# EAGLE board basic-inline-turbidimeter_main_board_v1.9 (EAGLE 7.3.0)
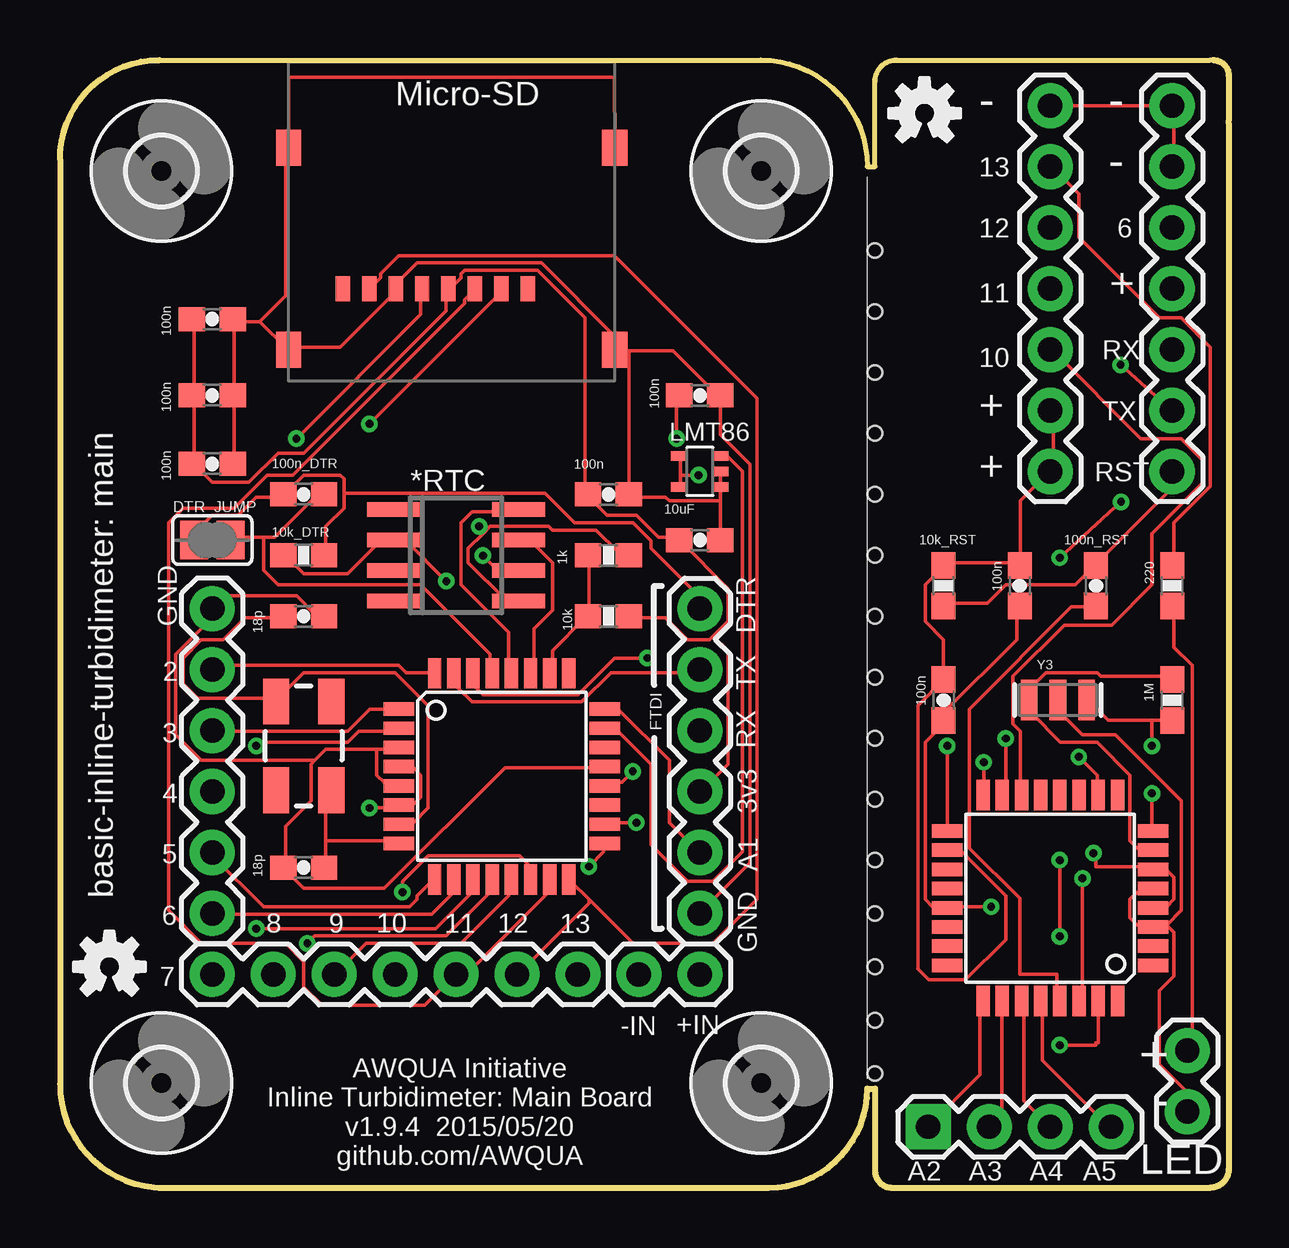
[diagram p0: board, top side]
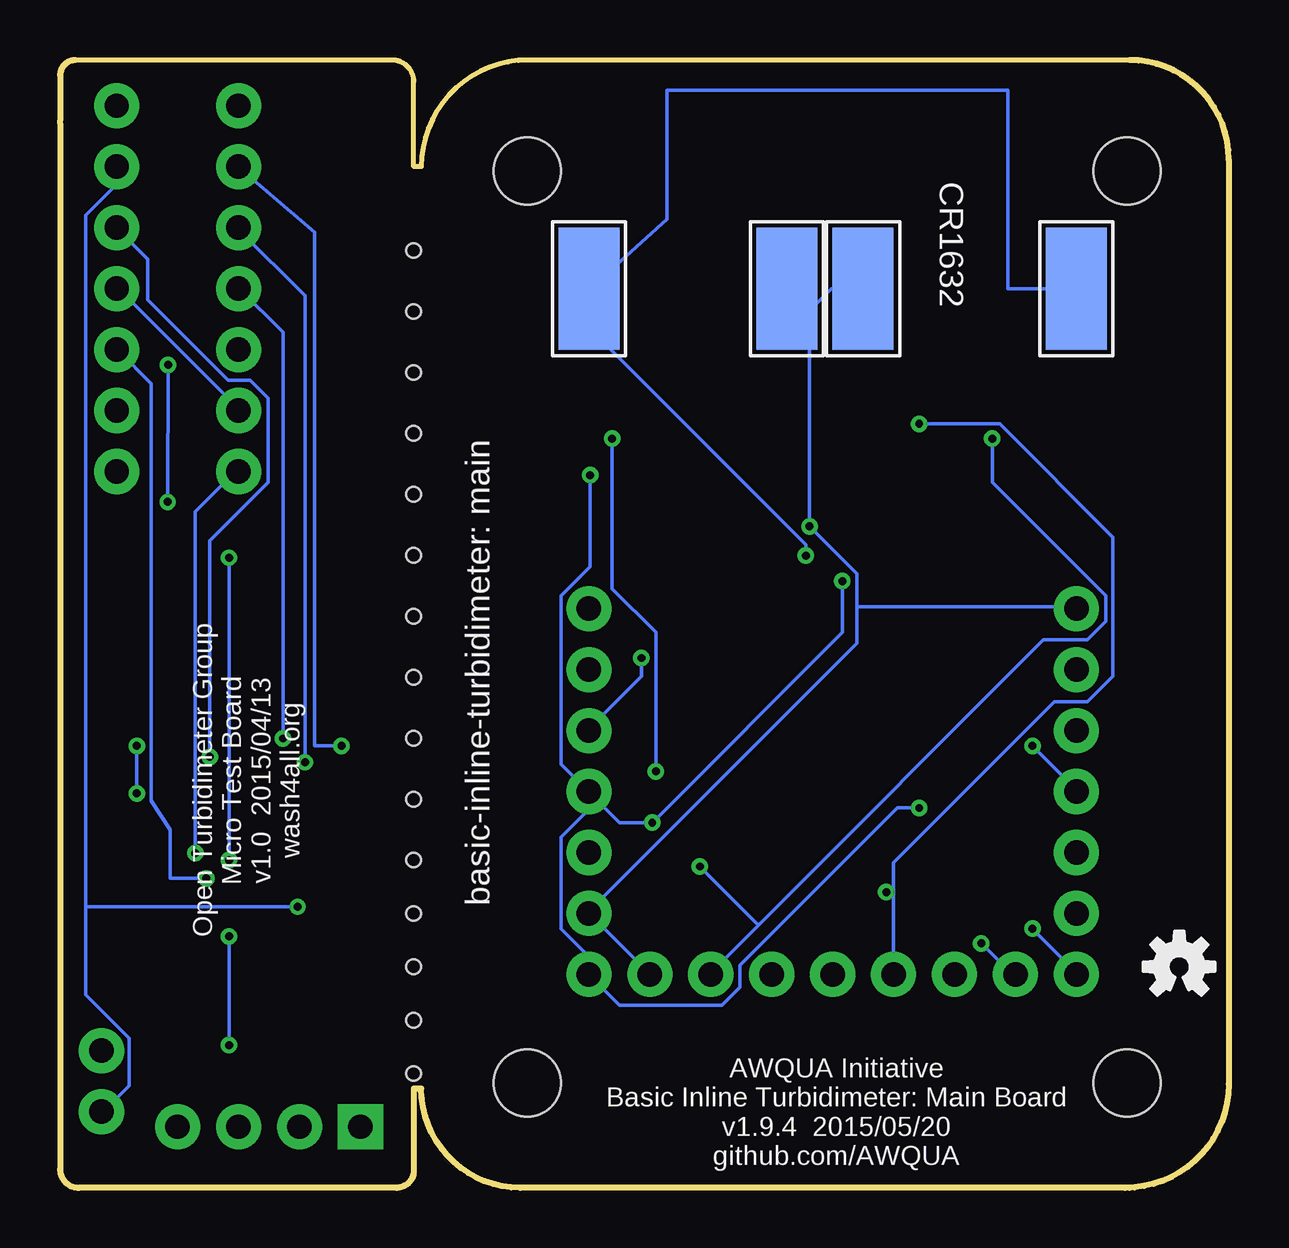
[diagram p1: board, bottom side, seen from below]

Size 48.72 x 46.99 mm. Coordinates in mm from the lower left corner, seen from the top.
Outline: 4.32,0 arc-90 0,4.32 0,42.85 arc-90 4.14,46.99
Outline: 48.72,44.37 48.72,0.78 arc-90 47.93,0
Outline: 48.07,46.99 arc-90 48.72,46.34 48.72,44.45
Outline: 4.13,46.99 29.21,46.99 arc-90 33.65,42.55 33.97,42.55 33.97,46.09 arc-90 34.87,46.99 47.94,46.99
Outline: 4.13,0 29.53,0 arc90 33.65,4.13 33.97,4.13 33.97,0.71 arc90 34.68,0 47.94,0
Copper layers (1*16): Top 0.0356mm / dielectric 1.5011mm / Bottom 0.0356mm
Design rules "default *": minimum track width 6mil, minimum drill 13mil, track to track 6mil, track to pad 6mil, pad to pad 6mil, via to via 6mil, smd to smd 6mil, copper to edge 15mil, drill to drill 6mil, minimum pad ring 7mil, minimum via ring 7mil, stop-mask expansion 4mil, vias tented up to drill 15mil, thermal gap 10mil
Holes 0.6 mm at 33.97,39.05 33.97,36.51 33.97,33.97 33.97,31.43 33.97,28.89 33.97,26.35 33.97,23.81 33.97,21.27 33.97,18.73 33.97,16.19 33.97,13.65 33.97,11.43 33.97,9.21 33.97,6.99 33.97,4.76

## Footprints (pad centres in the part's own frame; a part is rotated, then mirrored left to right if it is on the bottom)
DS3231M = smd 2.2 x 0.6: 1 -2.6,1.905; 2 -2.6,0.635; 3 -2.6,-0.635; 4 -2.6,-1.905; 5 2.6,-1.905; 6 2.6,-0.635; 7 2.6,0.635; 8 2.6,1.905
0603-CAP = smd 1.1 x 1: 1 -0.85,0; 2 0.85,0
SJ = smd 1.168 x 1.6: 1 -0.762,0; 2 0.762,0
TQFP32-08 = smd 1.27 x 0.559: 1 -4.293,2.8; 2 -4.293,2; 3 -4.293,1.2; 4 -4.293,0.4; 5 -4.293,-0.4; 6 -4.293,-1.2; 7 -4.293,-2; 8 -4.293,-2.8; 17 4.293,-2.8; 18 4.293,-2; 19 4.293,-1.2; 20 4.293,-0.4; 21 4.293,0.4; 22 4.293,1.2; 23 4.293,2; 24 4.293,2.8 | smd 0.559 x 1.27: 9 -2.8,-4.293; 10 -2,-4.293; 11 -1.2,-4.293; 12 -0.4,-4.293; 13 0.4,-4.293; 14 1.2,-4.293; 15 2,-4.293; 16 2.8,-4.293; 25 2.8,4.293; 26 2,4.293; 27 1.2,4.293; 28 0.4,4.293; 29 -0.4,4.293; 30 -1.2,4.293; 31 -2,4.293; 32 -2.8,4.293
1X02 = drill 1.016 pad 1.88: 1 0,0; 2 2.54,0
1X07 = drill 1.016 pad 1.88: 1 0,0; 2 2.54,0; 3 5.08,0; 4 7.62,0; 5 10.16,0; 6 12.7,0; 7 15.24,0
1X04 = drill 1.016 pad 1.88 square: 1 0,0 | drill 1.016 pad 1.88: 2 2.54,0; 3 5.08,0; 4 7.62,0
1X06 = drill 1.016 pad 1.88: 1 0,0; 2 2.54,0; 3 5.08,0; 4 7.62,0; 5 10.16,0; 6 12.7,0
MICROSD-1010030368 = smd 1.05 x 1.5: FT1 0,8.4; FT2 0,0; FT3 13.6,0; FT4 13.6,8.4 | smd 0.6 x 1.05: PIN1 9.97,2.53; PIN2 8.87,2.53; PIN3 7.77,2.53; PIN4 6.67,2.53; PIN5 5.57,2.53; PIN6 4.47,2.53; PIN7 3.37,2.53; PIN8 2.27,2.53
5-2,5 = smd 2.54 x 5.08: 1 0,0
0603-RES = smd 1.1 x 1: 1 -0.85,0; 2 0.85,0
2,8 = hole 2.8: 0,0
LMT86 = smd 0.4 x 0.7: 1 -0.65,-0.85; 2 0,-0.85; 3 0.65,-0.85; 4 0.65,0.85; 5 -0.65,0.85
CRYSTAL-SMD-5X3 = smd 1.9 x 1.1: 1 -1.85,-1.15; 2 1.85,-1.15; 3 1.85,1.15; 4 -1.85,1.15
RESONATOR-SMD = smd 0.7 x 1.7: 1 -1.2,0; 2 0,0; 3 1.2,0

## Placement (x,y rotation side)
*RTC  [DS3231M]  16.51,26.35 0 top
C1  18p  [0603-CAP]  10.16,23.81 180 top
C2  18p  [0603-CAP]  10.16,13.34 0 top
C3  100n_DTR  [0603-CAP]  10.16,28.89 0 top
C4  100n  [0603-CAP]  6.35,36.2 180 top
C5  100n  [0603-CAP]  26.67,33.02 180 top
C6  100n  [0603-CAP]  6.35,30.16 0 top
C7  100n  [0603-CAP]  22.86,28.89 180 top
C8  100n  [0603-CAP]  6.35,33.02 0 top
C9  100n  [0603-CAP]  36.83,20.32 270 top
C10  100n  [0603-CAP]  40,25.08 270 top
C11  100n_RST  [0603-CAP]  43.18,25.08 270 top
C12  10uF  [0603-CAP]  26.67,26.99 180 top
DTR_JUMP  [SJ]  6.35,26.99 180 top
IC1  MEGA8-AI  [TQFP32-08]  18.41,17.14 0 top
IC2  MEGA8-AI  [TQFP32-08]  41.27,12.06 180 top
JP1  M02PTH  [1X02]  24.13,8.89 0 top
JP2  [1X07]  46.35,45.09 270 top
JP3  [1X07]  41.27,45.09 270 top
JP4  [1X04]  36.2,2.54 0 top
JP5  [1X06]  26.67,11.43 90 top
JP6  [1X06]  6.35,24.13 270 top
JP8  [1X07]  21.59,8.89 180 top
LED  M02PTH  [1X02]  46.99,5.71 270 top
MICRO-SD  MICROSD-1010030368  [MICROSD-1010030368]  9.53,34.93 0 top
PAD1  WIREPADSMD5-2,5  [5-2,5]  26.67,37.47 0 bottom
PAD2  WIREPADSMD5-2,5  [5-2,5]  6.35,37.47 0 bottom
PAD3  WIREPADSMD5-2,5  [5-2,5]  18.41,37.47 0 bottom
PAD4  WIREPADSMD5-2,5  [5-2,5]  15.24,37.47 0 bottom
R1  10k  [0603-RES]  22.86,23.81 180 top
R2  1k  [0603-RES]  22.86,26.35 180 top
R3  10k_DTR  [0603-RES]  10.16,26.35 0 top
R4  10k_RST  [0603-RES]  36.83,25.08 90 top
R5  220  [0603-RES]  46.35,25.08 270 top
R8  1M  [0603-RES]  46.35,20.32 90 top
U$1  [2,8]  4.23,42.37 0 top
U$2  [OSHW-LOGO-S]  2.06,9.21 0 top
U$3  [2,8]  29.23,42.37 0 top
U$4  LMT86  [LMT86]  26.67,29.84 90 top
U$5  [2,8]  29.23,4.37 0 top
U$6  [2,8]  4.23,4.37 0 top
U$7  [OSHW-LOGO-S]  36.04,44.77 0 top
U$8  [OSHW-LOGO-S]  2.06,9.21 0 bottom
Y1  [CRYSTAL-SMD-5X3]  10.16,18.41 90 top
Y3  16MHz  [RESONATOR-SMD]  41.59,20.32 0 top

## Library data of the parts
*RTC MICRO-SD U$4 = open_source_turbidimeter
C1-C12 JP2 JP3 JP8 U$2 U$7 U$8 Y1 = SparkFun
DTR_JUMP = jumper
IC1 IC2 = atmel; MPN: ATMEGA8-16AU; OC_FARNELL: 9171371; OC_NEWARK: 73M8863
JP1 JP4-JP6 LED = SparkFun-Connectors
PAD1-PAD4 = wirepad
R1-R5 R8 = SparkFun-Resistors
U$1 U$3 U$5 U$6 = holes
Y3 = SparkFun-FreqCtrl; PROD_ID: XTAL-08900

## Nets
ADC6: IC1.19
ADC7: IC1.22
AREF: C5.2 IC1.20
GND: *RTC.5 C1.1 C2.1 C4.1 C5.1 C6.2 C7.1 C8.2 C12.1 IC1.3 IC1.5 IC1.21 JP1.1 JP5.1 JP6.1 MICRO-SD.FT1 MICRO-SD.FT2 MICRO-SD.FT3 MICRO-SD.FT4 MICRO-SD.PIN6 PAD3.1 PAD4.1 R2.1 U$4.1 U$4.2
GND2: C9.2 C10.2 IC2.3 IC2.5 IC2.21 JP2.1 JP2.2 JP3.1 LED.2 Y3.2
N$2: C11.2 IC2.29
N$9: LED.1 R5.2
N$11: IC2.7 R8.2 Y3.1
N$12: IC2.8 R8.1 Y3.3
PB0: IC1.12 JP8.6
PB1: IC1.13 JP8.5
PB2: IC1.14 JP8.4 MICRO-SD.PIN2
PB2_2: IC2.14 JP3.5
PB3: IC1.15 JP8.3 MICRO-SD.PIN3
PB3_2: IC2.15 JP3.4
PB4: IC1.16 JP8.2 MICRO-SD.PIN7
PB4_2: IC2.16 JP3.3
PB5: IC1.17 JP8.1 MICRO-SD.PIN5
PB5_2: IC2.17 JP3.2 R5.1
PC0: IC1.23 U$4.3
PC1: IC1.24 JP5.2
PC2: IC1.25
PC2_2: IC2.25 JP4.1
PC3: IC1.26 R1.2 R2.2
PC3_2: IC2.26 JP4.2
PC4: *RTC.7 IC1.27
PC4_2: IC2.27 JP4.3
PC5: *RTC.8 IC1.28
PC5_2: IC2.28 JP4.4
PC6: C3.2 DTR_JUMP.1 IC1.29
PD0: IC1.30 JP5.4
PD0_2: IC2.30 JP2.5
PD1: IC1.31 JP5.5
PD1_2: IC2.31 JP2.6
PD2: IC1.32 JP6.2
PD3: IC1.1 JP6.3
PD4: IC1.2 JP6.4
PD5: IC1.9 JP6.5
PD6: IC1.10 JP6.6
PD6_2: IC2.10 JP2.3
PD7: IC1.11 JP8.7
Q1: C2.2 IC1.8 Y1.1
Q2: C1.2 IC1.7 Y1.3
RST: C3.1 DTR_JUMP.2 JP5.6 R3.2
RST2: C11.1 JP2.7 R4.1
VBAT: *RTC.6 PAD1.1 PAD2.1
VCC: *RTC.2 C4.2 C6.1 C7.2 C8.1 C12.2 IC1.4 IC1.6 IC1.18 JP1.2 JP5.3 MICRO-SD.PIN4 R1.1 R3.1 U$4.4 U$4.5
VCC2: C9.1 C10.1 IC2.4 IC2.6 IC2.18 JP2.4 JP3.6 JP3.7 R4.2

## Tracks (layer width: path | path; a pad name or v marks a point on that pad's centre or on a via)
AREF  (via drill 0.33)
  Top 0.152: v25.71,31.22 25.71,32.89 C5.2 | v23.88,17.35 23.42,16.89 22.81,16.89 IC1.20
  Bottom 0.152: v25.71,31.22 25.71,24.97 23.88,23.14 v23.88,17.35
GND  (via drill 0.33)
  Top 0.152: U$4.2 27.53,29.84 27.53,29.23 U$4.1 27.53,29.08 27.53,28.63 | 27.53,28.63 27.53,27.1 C12.1 | 27.53,28.63 25.4,28.63 25.25,28.78 23.72,28.78 C7.1 23.72,28.93 23.72,34.87 | 23.72,34.87 23.27,34.87 MICRO-SD.FT3 23.11,35.03 23.11,35.48 20.07,38.53 14.88,38.53 14.12,37.77 14.12,37.47 MICRO-SD.PIN6 13.97,37.31 11.68,35.03 9.55,35.03 MICRO-SD.FT2 9.4,35.03 8.33,36.09 | 23.72,34.87 25.55,34.87 27.38,33.05 C5.1 27.53,32.89 27.53,31.37 28.75,30.15 28.75,13.54 26.77,11.56 JP5.1 | C6.2 7.26,30.3 7.26,32.89 C8.2 7.26,33.05 7.26,36.09 | 8.33,36.09 7.26,36.09 | 8.33,36.09 9.4,37.16 9.4,43.26 MICRO-SD.FT1 9.53,46.27 23.11,46.27 MICRO-SD.FT4 | 7.26,36.09 C4.1 | C1.1 10.92,23.9 10.62,23.9 9.86,24.66 6.81,24.66 6.35,24.21 JP6.1 6.35,23.75 4.83,22.22 4.83,18.87 5.89,17.8 10.62,17.8 | 10.62,17.8 11.07,18.26 13.21,18.26 | 10.62,17.8 10.46,17.65 10.46,16.13 9.4,15.06 9.4,13.39 C2.1 9.4,13.23 10.16,12.47 13.51,12.47 18.54,17.5 22.66,17.5 IC1.21 | 13.21,18.26 14.12,18.26 IC1.3 | 13.21,18.26 13.21,17.2 13.51,16.89 14.12,16.89 IC1.5 | 17.63,27.25 17.02,26.64 17.02,26.04 18.54,24.51 19,24.51 *RTC.5 | 17.63,27.25 17.93,27.56 20.37,27.56 20.52,27.41 22.35,27.41 23.27,26.49 23.57,26.49 R2.1 | 17.63,27.25 17.63,27.41 v17.48,27.56
  Bottom 0.152: JP1.1 24.18,8.97 26.62,11.4 JP5.1 26.62,11.56 15.49,22.68 15.49,24.21 | 17.48,36.55 v17.48,27.56 15.49,25.58 15.49,24.21 | 17.48,36.55 18.39,37.47 PAD3.1 17.48,36.55 | PAD4.1 16.56,37.47 17.48,36.55 | 15.49,24.21 6.35,24.21 JP6.1
GND2  (via drill 0.33)
  Top 0.152: C10.2 39.88,24.21 39.88,22.83 36.83,19.79 C9.2 36.83,19.33 36.07,18.57 36.07,12.01 36.37,11.71 36.98,11.71 | JP3.1 JP2.1 46.43,45.09 46.43,42.65 JP2.2 | IC2.3 45.52,10.95 44.91,10.95 44.6,11.25 44.6,12.01 44.91,12.32 45.52,12.32 IC2.5 | 46.13,10.95 46.74,11.56 46.74,16.13 43.99,18.87 42.62,18.87 41.71,19.79 41.71,20.24 Y3.2 | 46.13,10.95 45.67,10.95 IC2.3 | 46.13,10.95 46.43,10.64 46.43,8.81 45.82,8.2 45.82,5.16 46.89,4.09 46.89,3.17 LED.2 | 46.13,10.95 IC2.3 | v38.81,11.71 36.98,11.71 | 36.98,11.71 IC2.21
  Bottom 0.152: 47.65,11.71 47.65,8.05 45.82,6.22 45.82,4.24 46.89,3.17 LED.2 | 47.65,11.71 47.65,40.51 46.43,41.73 46.43,42.49 JP2.2 | 47.65,11.71 v38.81,11.71
N$2
  Top 0.152: C11.2 43.08,24.21 42.16,24.21 37.9,19.94 37.9,14.15 40,12.06 40,8.9 41.55,8.9 41.55,7.9 IC2.29
N$9
  Top 0.152: LED.1 47.19,5.92 47.19,21.77 46.43,22.53 46.43,24.21 R5.2
N$11
  Top 0.152: R8.2 46.28,21.31 43.38,21.31 43.23,21.46 41.1,21.46 40.49,20.85 40.49,20.4 Y3.1 40.49,20.24 40.49,19.79 41.71,18.57 43.23,18.57 44.6,17.2 44.6,14.45 44.91,14.15 45.52,14.15 IC2.7
N$12  (via drill 0.33)
  Top 0.152: 45.52,19.48 43.69,19.48 42.93,20.24 Y3.3 | 45.52,19.48 46.28,19.48 R8.1 | v45.52,16.43 45.52,14.91 IC2.8 | 45.52,19.48 v45.52,18.41
  Bottom 0.152: v45.52,18.41 v45.52,16.43
PB0  (via drill 0.33)
  Top 0.152: v10.31,10.19 10.62,10.49 16.1,10.49 17.93,12.32 17.93,12.78 IC1.12
  Bottom 0.152: v10.31,10.19 8.94,8.81 JP8.6
PB1
  Top 0.152: IC1.13 18.69,12.78 18.69,12.17 16.71,10.19 12.75,10.19 11.53,8.97 JP8.5
PB2  (via drill 0.33)
  Top 0.152: v12.9,31.83 18.39,37.31 MICRO-SD.PIN2 | v14.28,12.32 14.28,12.78 15.34,13.84 19.15,13.84 19.61,13.39 19.61,12.93 IC1.14
  Bottom 0.152: v12.9,31.83 9.55,31.83 4.83,27.1 4.83,21.31 5.89,20.24 7.26,20.24 13.97,13.54 13.97,12.32 | JP8.4 13.97,12.32 | 13.97,12.32 v14.28,12.32
PB2_2
  Top 0.152: IC2.14 40.03,16.43 40.03,19.02 39.73,19.33 39.73,21.31 41.86,23.44 43.84,23.44 45.52,25.12 45.52,27.25 47.65,29.39 47.65,30.3 46.74,31.22 45.06,31.22 41.4,34.87 JP3.5
PB3
  Top 0.152: MICRO-SD.PIN3 17.17,37.31 16.87,37.01 16.87,36.86 9.7,29.69 8.64,29.69 7.26,28.32 5.13,28.32 4.52,27.71 4.52,11.56 5.89,10.19 9.4,10.19 10.16,9.42 10.16,8.36 10.92,7.6 15.19,7.6 16.41,8.81 JP8.3 16.56,8.97 17.02,8.97 20.37,12.32 20.37,12.78 IC1.15
PB3_2  (via drill 0.33)
  Top 0.152: v39.42,18.72 39.42,16.43 IC2.15
  Bottom 0.152: v39.42,18.72 39.42,35.64 41.25,37.47 JP3.4
PB4
  Top 0.152: 22.05,12.01 21.29,12.78 IC1.16 | 22.05,12.01 23.88,10.19 27.23,10.19 29.06,12.01 29.06,32.89 23.11,38.84 14.12,38.84 13.36,38.08 13.36,37.92 12.9,37.47 MICRO-SD.PIN7 | 22.05,12.01 22.05,11.86 19.15,8.97 JP8.2
PB4_2  (via drill 0.33)
  Top 0.152: v38.51,17.73 38.51,16.43 IC2.16
  Bottom 0.152: v38.51,17.73 38.51,37.16 41.25,39.9 JP3.3
PB5  (via drill 0.33)
  Top 0.152: v9.86,31.22 15.04,36.4 15.04,37.31 MICRO-SD.PIN5 | v22.05,13.39 22.66,14 22.66,14.3 IC1.17
  Bottom 0.152: v9.86,31.22 9.86,29.39 5.13,24.66 5.13,23.6 5.89,22.83 7.72,22.83 19.61,10.95 | 19.61,10.95 21.59,8.97 JP8.1 | 19.61,10.95 v22.05,13.39
PB5_2  (via drill 0.33)
  Top 0.152: R5.1 46.43,26.04 46.43,27.71 47.95,29.23 47.95,35.03 46.74,36.25 45.82,36.25 42.47,39.6 42.47,41.43 41.4,42.49 JP3.2 | v36.98,18.41 IC2.17
  Bottom 0.152: v36.98,18.41 38.1,18.41 38.1,39.82 41.25,42.49 JP3.2
PC0
  Top 0.152: U$4.3 27.53,30.45 27.84,30.45 28.45,29.84 28.45,14 27.23,12.78 26.16,12.78 24.64,14.3 24.64,17.65 23.27,19.02 22.81,19.02 IC1.23
PC1
  Top 0.152: IC1.24 22.81,19.94 23.27,19.94 25.4,17.8 25.4,15.21 26.62,14 JP5.2
PC2_2
  Top 0.152: JP4.1 38.35,4.7 38.35,7.75 IC2.25
PC3
  Top 0.152: R2.2 22.05,26.34 22.05,23.9 R1.2 21.89,23.75 20.52,22.38 20.52,21.46 IC1.26
PC3_2
  Top 0.152: IC2.26 39.27,7.75 39.27,3.02 38.81,2.57 JP4.2
PC4
  Top 0.152: IC1.27 19.76,21.46 19.76,23.29 20.52,24.05 20.52,26.04 19.61,26.95 19.15,26.95 *RTC.7
PC4_2
  Top 0.152: JP4.3 40.18,3.63 40.18,7.75 IC2.27
PC5
  Top 0.152: IC1.28 18.69,21.46 18.69,23.14 16.71,25.12 16.71,27.71 17.17,28.17 19,28.17 *RTC.8
PC5_2
  Top 0.152: IC2.28 40.95,7.75 40.95,5.31 43.69,2.57 JP4.4
PC6
  Top 0.152: 8.48,27.1 7.11,27.1 DTR_JUMP.1 | 8.48,27.1 8.94,27.1 10.62,28.78 10.92,28.78 C3.2 | 8.48,27.1 8.48,25.73 9.09,25.12 15.04,25.12 17.93,22.22 17.93,21.46 IC1.29
PD0  (via drill 0.33)
  Top 0.152: v24.49,22.07 23.11,22.07 21.59,20.55 17.63,20.55 17.32,20.85 17.32,21.31 IC1.30
  Bottom 0.152: v24.49,22.07 24.49,21.31 26.62,19.18 JP5.4
PD0_2  (via drill 0.33)
  Top 0.152: v42.62,12.89 42.62,7.9 IC2.30
  Bottom 0.152: v42.62,12.89 44.13,12.89 44.13,14.92 44.91,16.13 44.91,33.5 46.28,34.87 JP2.5
PD1
  Top 0.152: IC1.31 16.56,21.31 16.56,20.85 17.17,20.24 21.74,20.24 22.96,21.46 26.62,21.46 JP5.5
PD1_2  (via drill 0.33)
  Top 0.152: v44.23,28.57 v41.67,26.25 | v44.21,34.29 46.28,32.44 JP2.6 | 43.38,7.75 IC2.31 43.27,6.03 43.18,6.03 43.18,5.94 v41.67,5.94 | v41.67,10.48 v41.67,13.65
  Bottom 0.152: v41.67,26.25 v41.67,13.65 | v44.21,34.29 v44.23,28.57 | v41.67,5.94 v41.67,10.48
PD2
  Top 0.152: IC1.32 15.49,21.46 14.43,21.46 14.12,21.77 6.5,21.77 6.35,21.61 JP6.2
PD3
  Top 0.152: IC1.1 12.9,19.94 11.99,19.02 6.35,19.02 JP6.3
PD4  (via drill 0.33)
  Top 0.152: v8.18,18.41 8.33,18.57 11.99,18.57 12.45,19.02 14.12,19.02 IC1.2
  Bottom 0.152: v8.18,18.41 6.35,16.59 JP6.4
PD5
  Top 0.152: IC1.9 15.49,12.78 14.88,12.17 14.88,12.01 14.58,11.71 8.48,11.71 6.35,13.84 JP6.5
PD6
  Top 0.152: IC1.10 16.41,12.78 16.41,12.32 15.49,11.4 6.35,11.4 JP6.6
PD6_2  (via drill 0.33)
  Top 0.152: v42.47,17.96 43.23,17.2 43.23,16.43 IC2.10
  Bottom 0.152: v42.47,17.96 42.47,26.95 40.03,29.39 40.03,32.89 40.79,33.66 41.71,33.66 45.06,37.01 45.06,38.68 46.28,39.9 JP2.3
PD7  (via drill 0.33)
  Top 0.152: v8.18,10.79 15.65,10.79 17.17,12.32 17.17,12.78 IC1.11
  Bottom 0.152: v8.18,10.79 6.35,8.97 JP8.7
Q1
  Top 0.152: 11.07,14.45 11.07,16.28 11.23,16.43 Y1.1 | 11.07,14.45 11.07,13.39 C2.2 | 11.07,14.45 14.12,14.45 IC1.8
Q2
  Top 0.152: C1.2 9.25,23.75 7.72,23.75 6.81,22.83 5.89,22.83 5.13,22.07 5.13,21.01 5.74,20.4 8.94,20.4 Y1.3 9.09,20.4 10.16,21.46 13.97,21.46 15.34,20.09 15.34,15.82 14.73,15.21 14.12,15.21 IC1.7
RST
  Top 0.152: DTR_JUMP.2 5.59,27.25 6.35,28.02 7.42,28.02 8.18,28.78 9.25,28.78 C3.1 9.4,28.93 10.16,29.69 11.68,29.69 11.84,29.54 11.84,28.93 | 11.84,28.93 11.84,28.32 11.07,27.56 11.07,26.49 R3.2 | 11.84,28.93 20.22,28.93 21.44,27.71 23.88,27.71 24.64,26.95 24.64,26.64 26.62,24.66 26.62,24.21 JP5.6
RST2
  Top 0.152: R4.1 36.83,24.36 38.66,24.36 39.42,25.12 42.32,25.12 43.08,25.88 C11.1 43.23,26.04 46.28,29.08 46.28,29.84 JP2.7
VBAT  (via drill 0.33)
  Top 0.152: v17.63,26.34 18.24,25.73 19,25.73 *RTC.6
  Bottom 0.152: v17.63,26.34 17.63,26.8 26.62,35.79 26.62,37.47 | 26.62,37.47 23.41,40.36 23.41,45.72 9.21,45.72 9.21,37.47 PAD2.1 | 26.62,37.47 PAD1.1
VCC  (via drill 0.33)
  Top 0.152: 27.23,22.99 27.84,23.6 27.84,24.97 25.86,26.95 C12.2 25.71,27.1 24.94,27.1 24.03,28.02 22.81,28.02 22.05,28.78 C7.2 21.89,28.93 21.89,36.25 19.91,38.23 16.87,38.23 16.71,38.08 16.71,37.92 16.26,37.47 MICRO-SD.PIN4 16.1,37.31 16.1,36.55 10.16,30.61 9.09,30.61 7.87,29.39 6.35,29.39 5.59,30.15 C6.1 5.59,30.3 5.59,32.89 C8.1 5.59,33.05 5.59,36.09 C4.2 | 27.23,22.99 27.08,22.83 26.16,22.83 25.25,23.75 23.72,23.75 R1.1 | IC1.4 14.12,17.5 14.73,17.5 15.04,17.2 15.04,16.28 14.73,15.98 14.12,15.98 IC1.6 14.12,15.82 v12.9,15.82 | R3.1 9.4,26.34 10.16,25.58 11.99,25.58 13.36,26.95 13.82,26.95 *RTC.2 13.97,26.95 14.43,26.95 v16.1,25.27 | 25.86,29.69 25.86,30.45 U$4.4 | 25.86,29.69 25.86,29.23 U$4.5 | v26.62,29.69 25.86,29.69 | v24.03,15.21 22.81,15.21 IC1.18 | 27.23,22.99 27.84,22.38 27.84,17.65 26.77,16.59 JP5.3
  Bottom 0.152: v12.9,15.82 13.82,15.82 20.37,9.27 20.37,8.36 21.13,7.6 25.4,7.6 26.62,8.81 JP1.2 26.77,8.97 26.77,9.73 27.84,10.79 27.84,14.61 26.31,16.13 | v26.62,29.69 26.62,25.88 27.84,24.66 27.84,17.65 26.77,16.59 JP5.3 | 26.31,16.13 26.62,16.43 JP5.3 | 26.31,16.13 25.4,15.21 v24.03,15.21 16.1,23.14 v16.1,25.27 | 26.31,16.13 JP5.3
VCC2  (via drill 0.33)
  Top 0.152: IC2.18 36.98,14 37.59,14 39.42,12.17 39.42,10.34 37.74,8.66 36.22,8.66 35.76,9.12 35.76,20.09 C9.1 36.83,22.83 36.07,23.6 36.07,25.12 36.83,25.88 R4.2 36.83,26.04 39.88,26.04 C10.1 40.03,26.04 40.03,28.63 41.25,29.84 JP3.7 41.4,29.84 41.4,32.28 JP3.6 | IC2.4 45.67,11.71 46.13,11.71 46.43,12.01 46.43,12.93 46.13,13.23 45.67,13.23 IC2.6 45.52,13.39 43.18,13.39 43.18,13.84 v43.08,13.95
  Bottom 0.152: v43.08,13.95 43.08,28.17 41.4,29.84 JP3.7 | JP2.4 46.28,37.47 41.25,32.44 JP3.6

## Text on the board
tPlace: - | - | 13 | - | 12 | 6 | 11 | + | 10 | RX | + | TX | + | RST | DTR | 2 | TX | RX | 3 | FTDI | 3v3 | 4 | 5 | A1 | GND | 6 | 8 | 9 | 10 | 11 | 12 | 13 | 7 | -IN | +IN | AWQUA Initiative / Inline Turbidimeter: Main Board / v1.9.4 2015/05/20 / github.com/AWQUA | A2 | A3 | A4 | A5
bPlace: AWQUA Initiative / Basic Inline Turbidimeter: Main Board / v1.9.4 2015/05/20 / github.com/AWQUA
tNames: Micro-SD | GND | basic-inline-turbidimeter: main | + | -
bNames: CR1632 | Open Turbidimeter Group / Micro Test Board / v1.0 2015/04/13 / wash4all.org | basic-inline-turbidimeter: main